# Altium PCB PCB1.PcbDoc
Units mm, origin at the board's own origin, x right, y up, seen from the top; angles counter-clockwise.
Board outline 52 x 52 mm, 4 copper layers (Top Layer, Layer 1, Layer 2, Bottom Layer), stack 1.448 mm thick; 9 components, 17 nets, 66 pads, 0 vias.
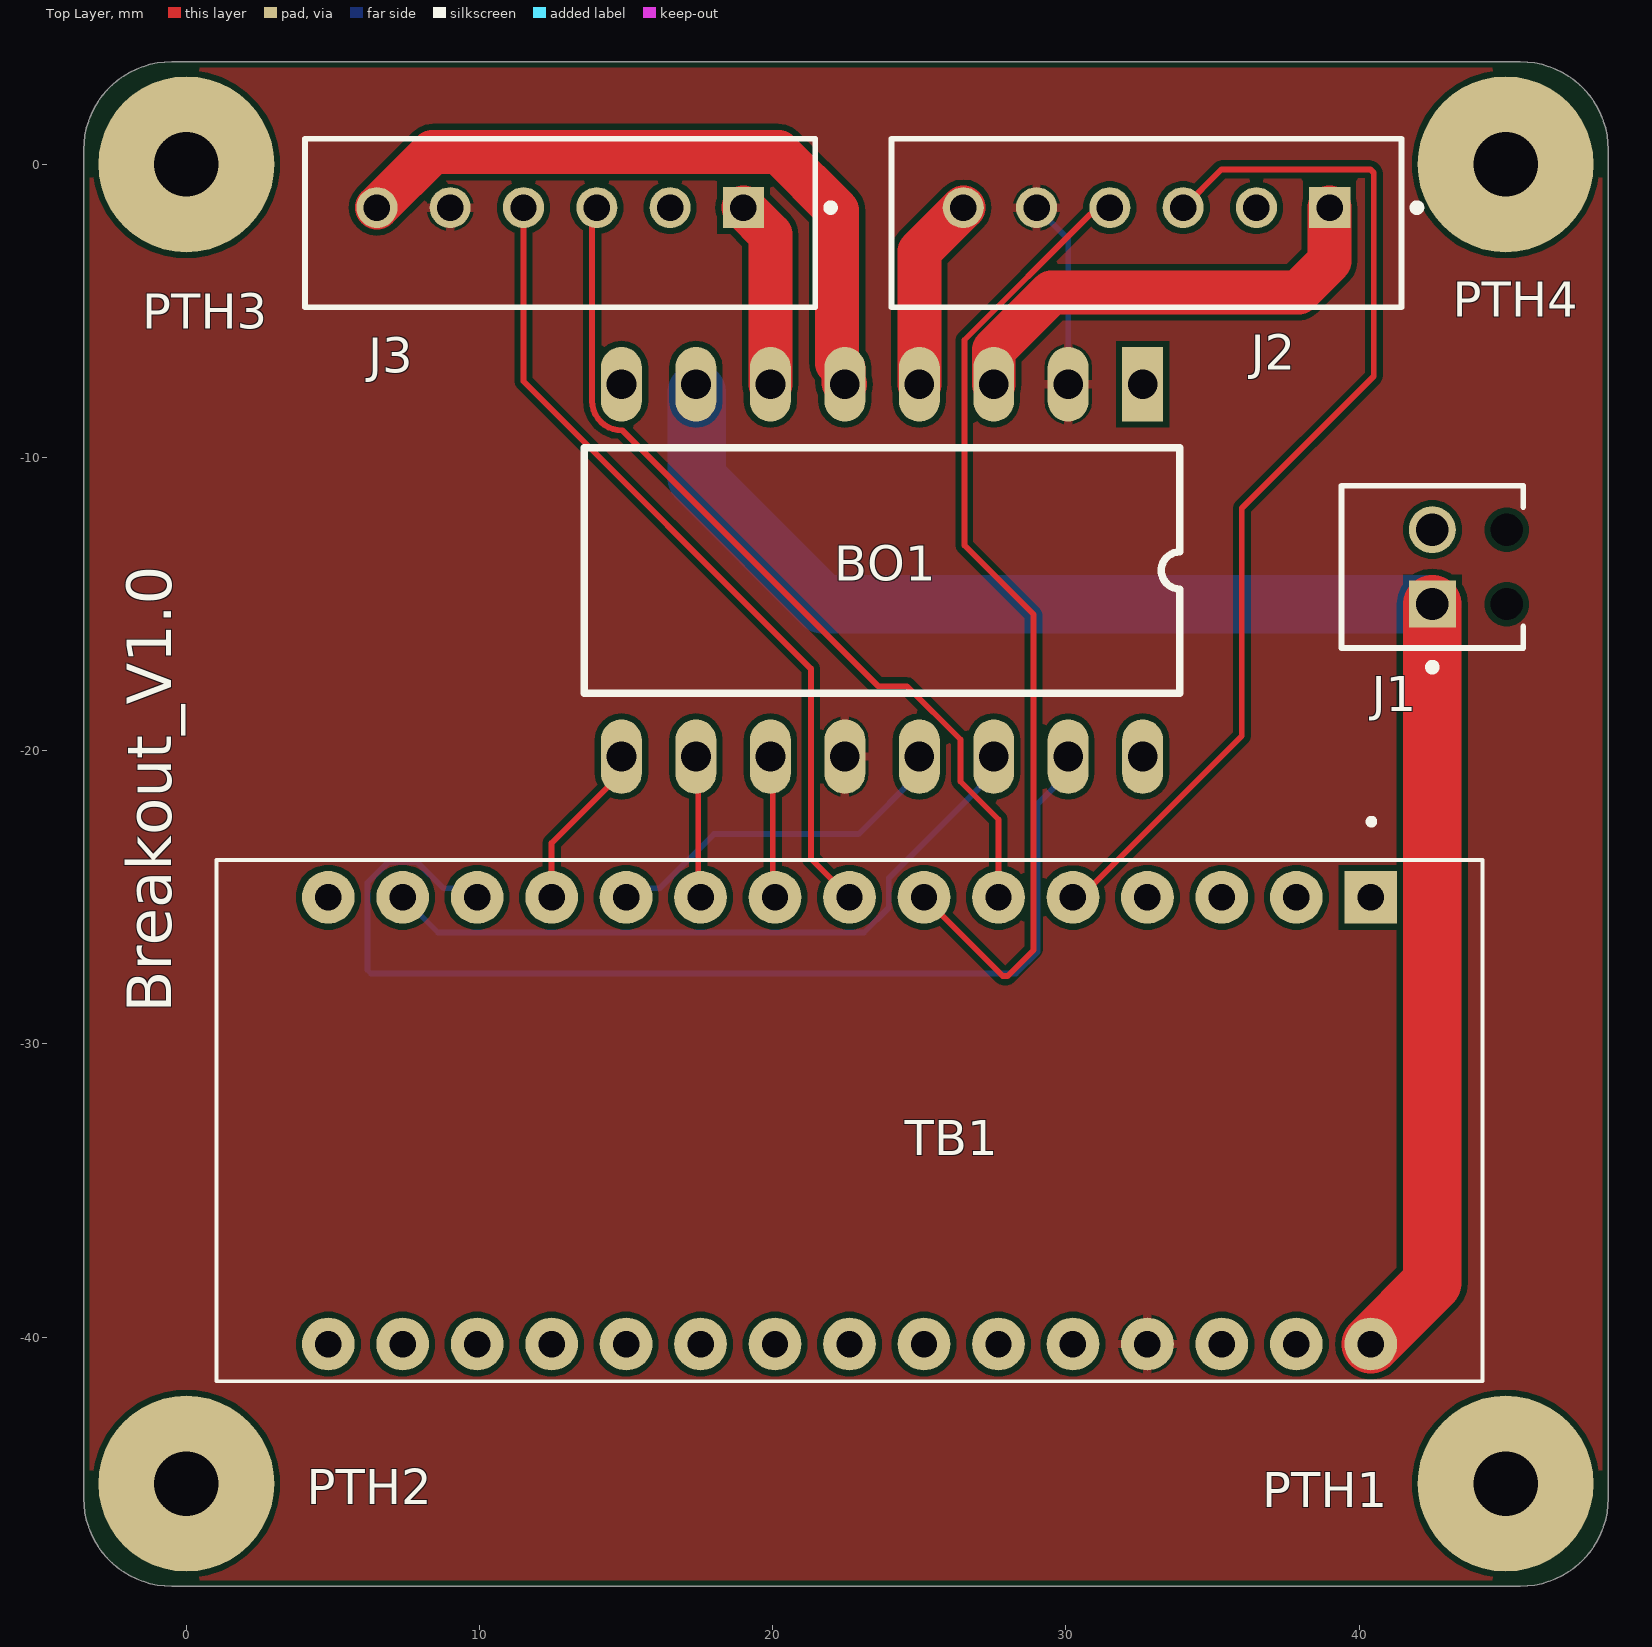
[diagram p0: Top Layer view]
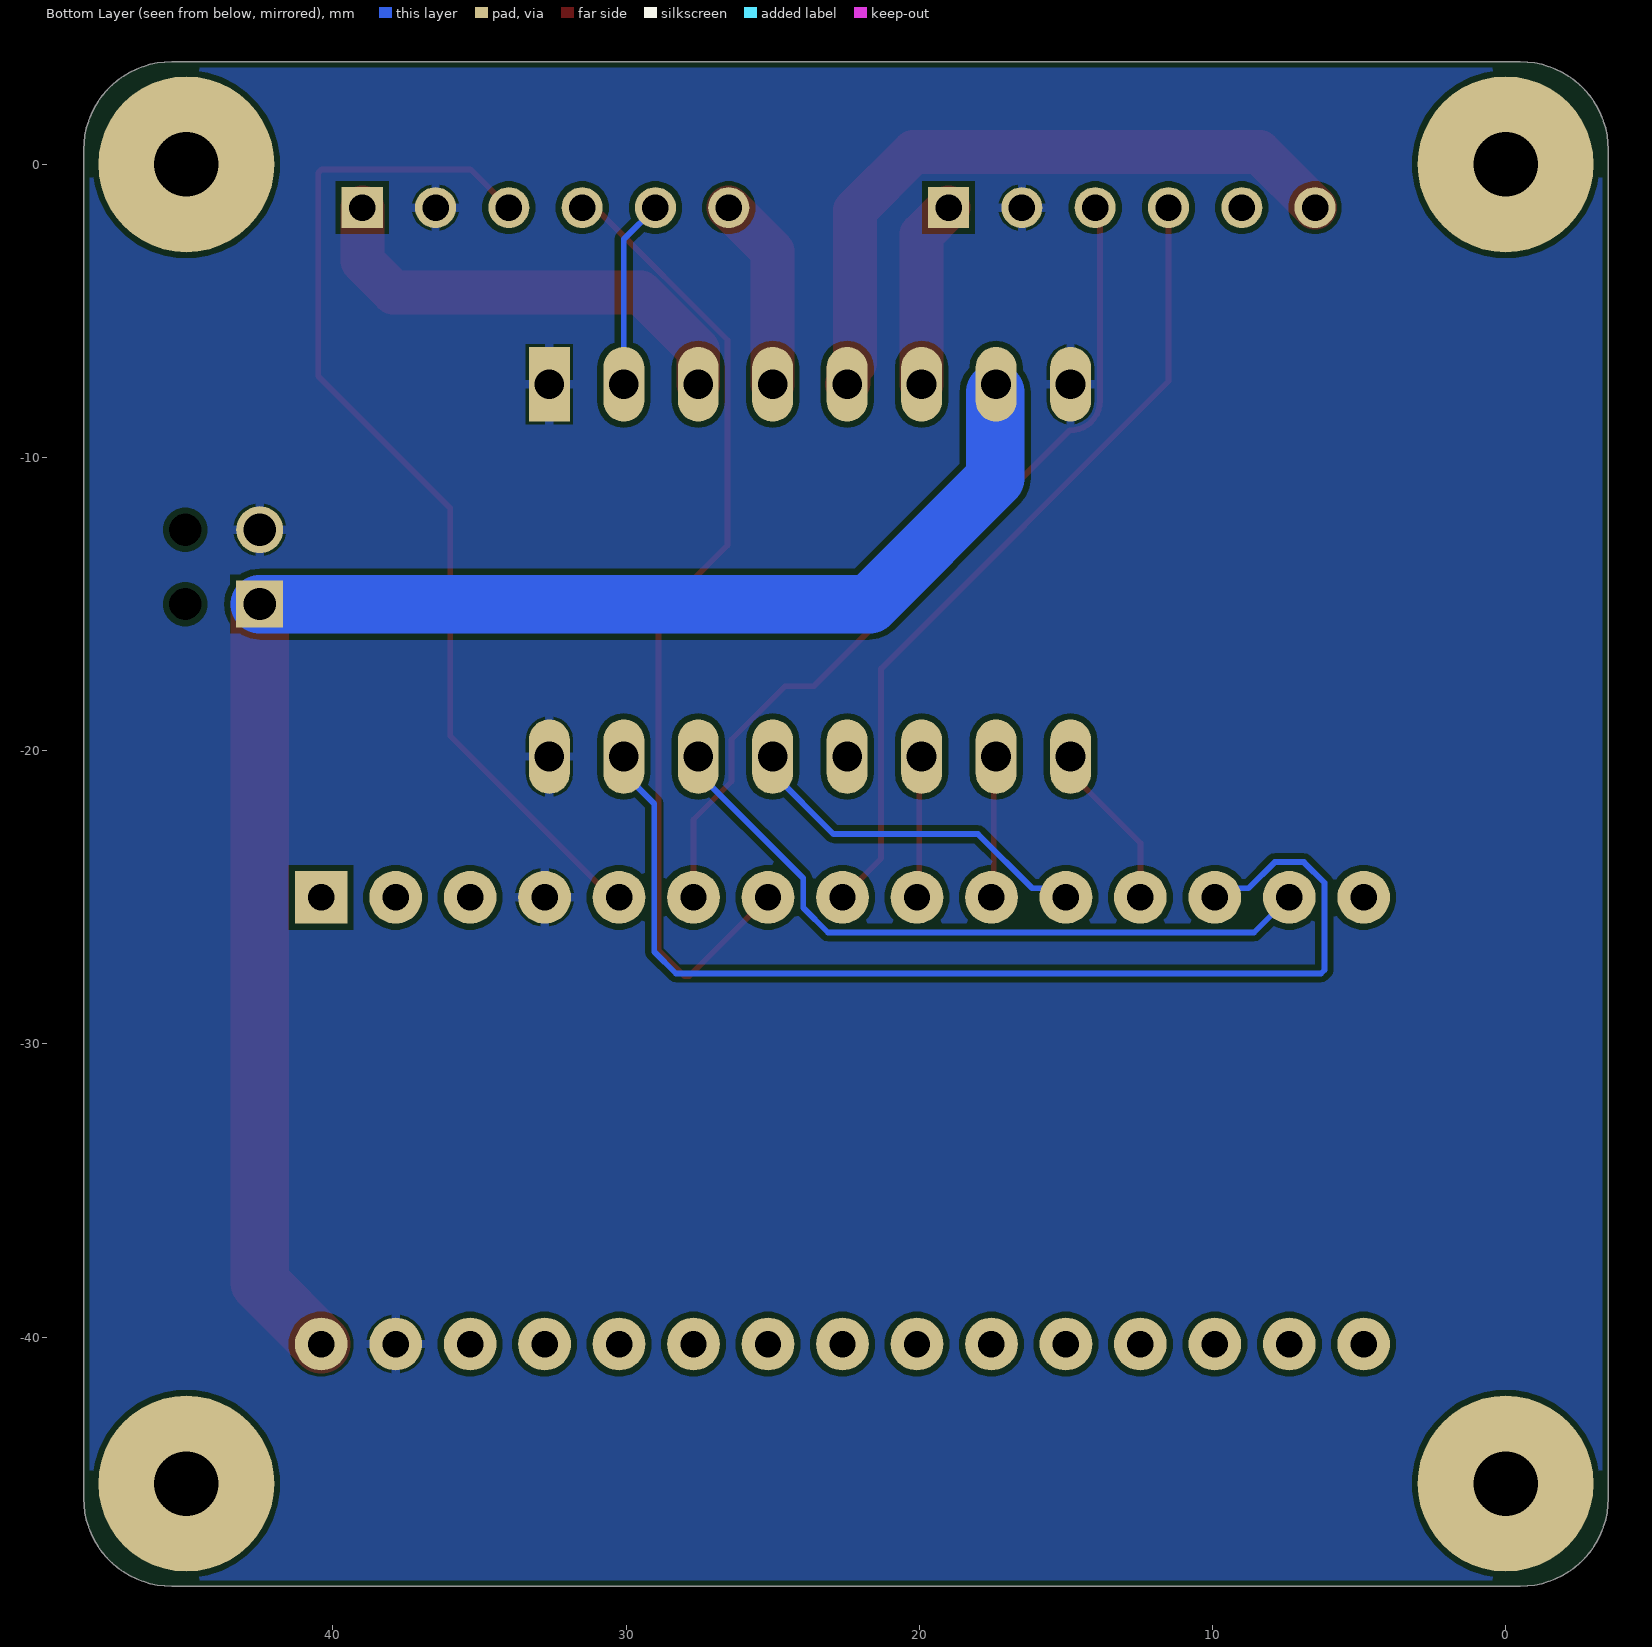
[diagram p1: Bottom Layer view, seen from below]
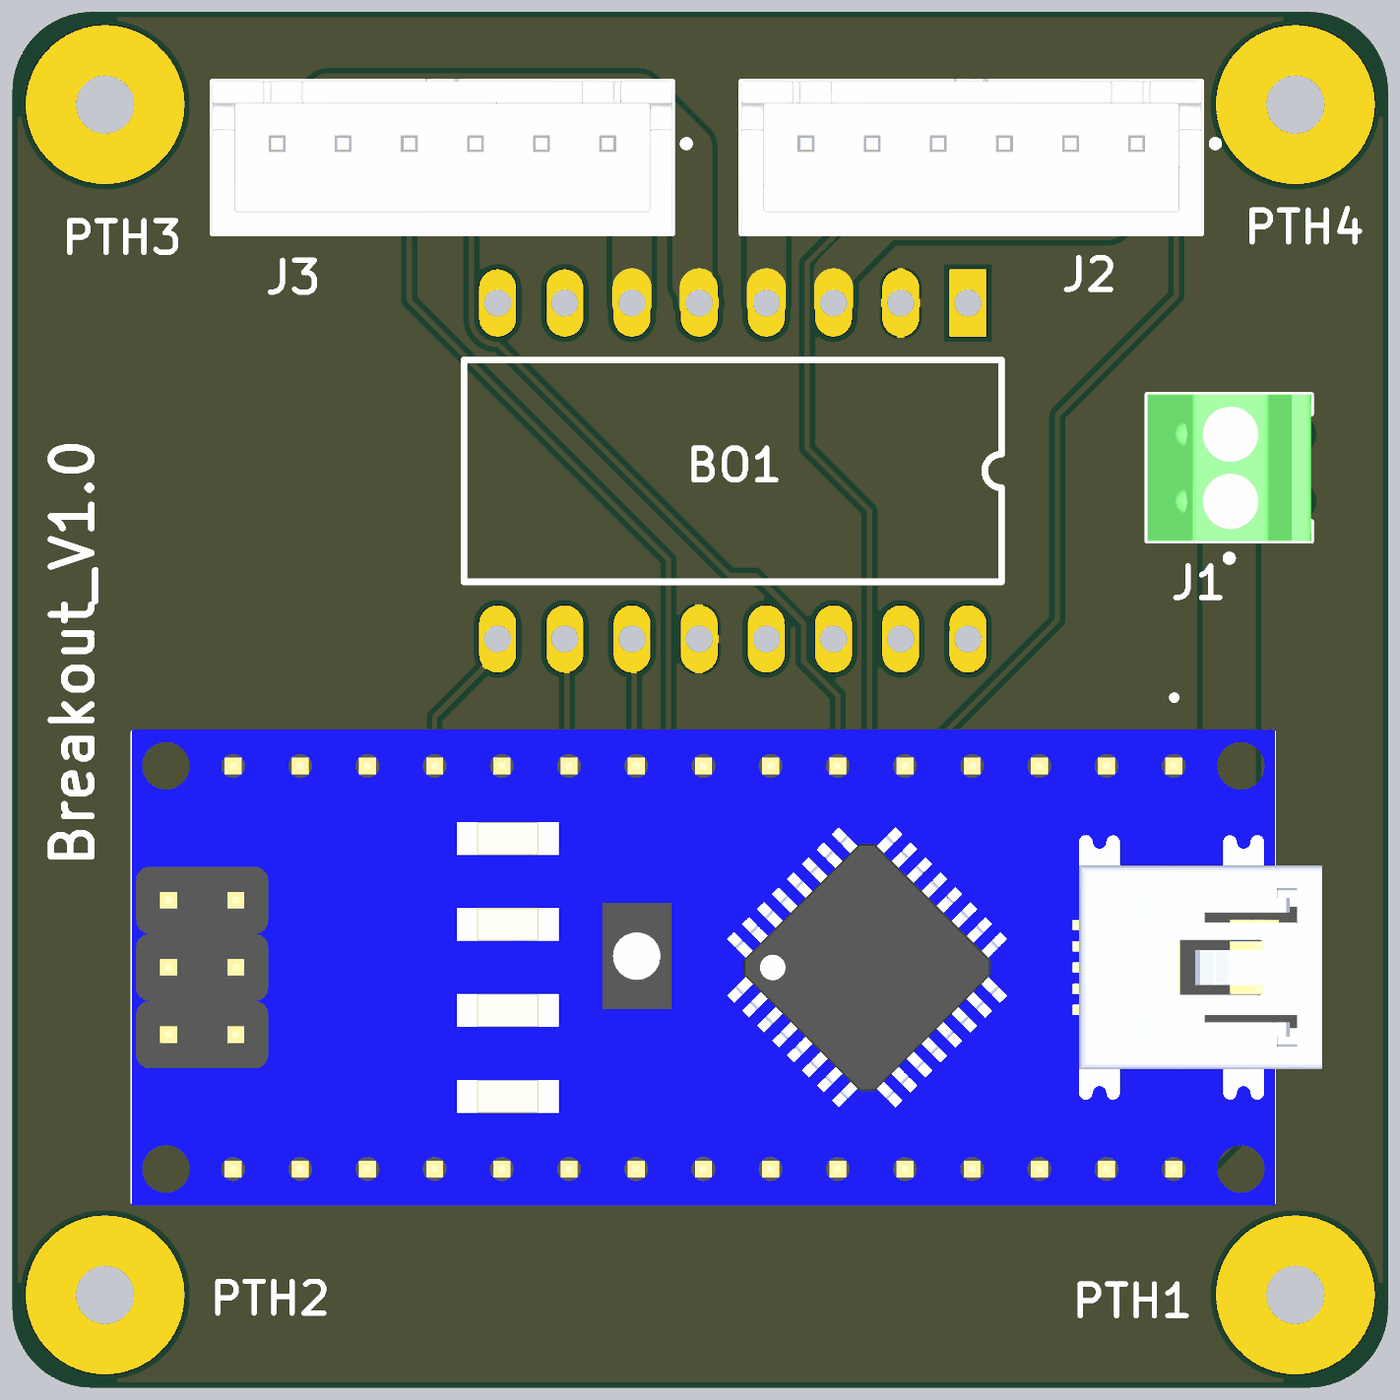
[diagram p2: 3D render of the assembled board from above, using the file's embedded part models]

## Layer stack, top to bottom
Top Solder: solder mask 0.0102, Solder Resist, Dk 3.5
Top Layer: signal copper 0.0356
Dielectric 2: prepreg 0.0711, PP-006, Dk 4.1
Layer 1: signal copper 0.0175
Dielectric 1: dielectric 1.2, FR-4, Dk 4.8
Layer 2: signal copper 0.0175
Dielectric 3: prepreg 0.0711, PP-006, Dk 4.1
Bottom Layer: signal copper 0.0356
Bottom Solder: solder mask 0.0102, Solder Resist, Dk 3.5

## Board outline
-3.5,-45.5 -3.5,0.5 cw(c-0.5,0.5) -0.5,3.5 45.5,3.5 cw(c45.5,0.5) 48.5,0.5 48.5,-45.5 cw(c45.5,-45.5) 45.5,-48.5 -0.5,-48.5 cw(c-0.5,-45.5)

## Design rules (kind name [scope] priority, off if disabled: settings)
BoardOutlineClearance [All] p1: gap=0.2 ignorepadtopadclearanceinfootprint=FALSE
Clearance [All] p1: gap=0.2 ignorepadtopadclearanceinfootprint=TRUE except(0: Arc-Text Arc-Hole Track-Text Track-Hole SMDPad-Text SMDPad-Hole THPad-Text THPad-Hole Via-Text Via-Hole Fill-Text Fill-Hole Poly-Text Poly-Hole Region-Text Region-Hole Text-Text Text-Hole; 0.1: Arc-Arc Arc-Track Track-Track)
HoleSize [All] p1: absolutevalues=TRUE maxlimit=6.3 minlimit=0.3 maxpercent=80.000 minpercent=20.000
MinimumAnnularRing [All] p1: minimumring=0.13
MinimumSolderMaskSliver [All] p1: minsoldermaskwidth=0.098
PolygonConnect "PTH-M3 Connect" [All vs HasFootprint('PTH-M3')] p1: connectstyle=Direct reliefconductorwidth=0.254 reliefentries=4 polygonreliefangle="90 Angle" airgapwidth=0.254
PolygonConnect [All] p2: thpad.connectstyle=Relief thpad.reliefconductorwidth=0.3 thpad.reliefentries=4 thpad.polygonreliefangle="90 Angle" thpad.airgapwidth=0.1 smdpad.connectstyle=Relief smdpad.reliefconductorwidth=0.3 smdpad.reliefentries=4 smdpad.polygonreliefangle="90 Angle" smdpad.airgapwidth=0.1 via.connectstyle=Direct via.reliefconductorwidth=0.254 via.reliefentries=4 via.polygonreliefangle="90 Angle" via.airgapwidth=0.254
RoomDefinition Schemeatic_1_0 [InComponentClass('Schemeatic_1_0')] p1: confinementstyle=ConfineIn formatcopy=TRUE lockcomponents=FALSE outline -7.5,-50.4 50.4,-50.4 50.4,5.4 -7.5,5.4
RoutingVias [All] p1: holewidth=0.3 width=0.6 viastyle="Through Hole" minholewidth=0.3 minwidth=0.45 maxholewidth=6.35 maxwidth=3
SilkToSilkClearance [All] p1: silktosilkclearance=0.1
SilkToSolderMaskClearance [IsPad] p1: minsilkscreentomaskgap=0 clearancetoexposedcopper=TRUE
SolderMaskExpansion "Tent Vias" [IsVia] p1: expansion=0.102 istentingtop=TRUE
SolderMaskExpansion [All] p2: expansion=0.038 istentingtop=FALSE
Width PowerNets [InNetClass('PowerNets')] p1: maxlimit=0.5 minlimit=0.2 preferedwidth=0.2 minimp=50.000000 maximp=50.000000 favimp=50.000000
Width [All] p2: maxlimit=2 minlimit=0.1 preferedwidth=0.2 minimp=50.000000 maximp=50.000000 favimp=50.000000
26 further rules are at their usual default settings.

## Components (designator, comment, footprint, x,y, rotation, side; value= is the part's Value field where it differs from the comment)
BO1 "TB6612FNG Dual Motor Driver Carrier" "DIP16 - duplicate1" 32.62,-7.5 r270 top
J1 "1725656" PHOE-1725656-2 42.5,-13.73 r90 top
J2 "B6B-XH-A(LF)(SN)" FP-B6B-XH-A_LF_SN-MFG 32.75,-2 r180 top
J3 "B6B-XH-A(LF)(SN)" FP-B6B-XH-A_LF_SN-MFG 12.75,-2 r180 top
PTH1 "PTH-M2" PTH-M2#1 47.5,-45 r0 top
PTH2 "PTH-M2" PTH-M2#2 0,-45 r0 top
PTH3 "PTH-M2" PTH-M2#2 0,0 r0 top
PTH4 "PTH-M2" PTH-M2#2 45,0 r0 top
TB1 "ARDUINO_NANO" SHIELD_ARDUINO_NANO 22.62,-32.62 r270 top

## Footprints (in the part's own frame and the unit in brackets; to place one, negate y for a bottom-side part, rotate by r counter-clockwise, add the part's x,y. Pads: shape width x height; smd on the part's side, far side on the other; paste and mask are expansions set on the pad)
"DIP16 - duplicate1" [mil]
  rect 100x55 hole 40: 1(0,0)
  oval 100x55 hole 40: 2(0,-100) 3(0,-200) 4(0,-300) 5(0,-400) 6(0,-500) 7(0,-600) 8(0,-700) 9(500,-700) 10(500,-600) 11(500,-500) 12(500,-400) 13(500,-300) 14(500,-200) 15(500,-100) 16(500,0)
  silkscreen extent 85,-750 415,50
FP-B6B-XH-A_LF_SN-MFG [mm]
  rect 1.4x1.4 hole 0.9 paste-1000 mask+0: 1(-6.25,-0.525)
  round 1.4 hole 0.9 paste-1000 mask+0: 2(-3.75,-0.525) 3(-1.25,-0.525) 4(1.25,-0.525) 5(3.75,-0.525) 6(6.25,-0.525)
  silkscreen extent -9.35,-2.88 8.7,2.88, body extent -8.8,-2.98 8.8,2.98, height 0.25
PHOE-1725656-2 [mm] "Connector, 2-Leads, Body 6.2x5.4mm, Pitch 2.54mm"
  rect 1.6x1.6 hole 1.1: 1(-1.27,0)
  round 1.6 hole 1.1: 2(1.27,0)
  round 0 hole 1.1 unplated: MH1(-1.27,-2.54) MH2(1.27,-2.54)
  silkscreen extent -3.54,-3.1 2.77,3.1, body extent -2.77,-3.1 2.77,3.1, height 9
PTH-M2#1 [mm] "M2 Clearance (2.2 mm) Plated Through Hole, 6mm Diameter Pad"
  round 6 hole 2.2: 1(-2.5,0)
PTH-M2#2 [mm] "M2 Clearance (2.2 mm) Plated Through Hole, 6mm Diameter Pad"
  round 6 hole 2.2: 1(0,0)
SHIELD_ARDUINO_NANO [mm]
  rect 1.8x1.8 / inner round 1.8 / far side rect 1.8x1.8 hole 0.9: 1(-7.62,17.78)
  round 1.8 hole 0.9: 2(-7.62,15.24) 3(-7.62,12.7) 4(-7.62,10.16) 5(-7.62,7.62) 6(-7.62,5.08) 7(-7.62,2.54) 8(-7.62,0) 9(-7.62,-2.54) 10(-7.62,-5.08) 11(-7.62,-7.62) 12(-7.62,-10.16) 13(-7.62,-12.7) 14(-7.62,-15.24) 15(-7.62,-17.78) 16(7.62,-17.78) 17(7.62,-15.24) 18(7.62,-12.7) 19(7.62,-10.16) 20(7.62,-7.62) 21(7.62,-5.08) 22(7.62,-2.54) 23(7.62,0) 24(7.62,2.54) 25(7.62,5.08) 26(7.62,7.62) 27(7.62,10.16) 28(7.62,12.7) 29(7.62,15.24) 30(7.62,17.78)
  silkscreen extent -10.3,-21.59 8.89,21.59, body extent -9,-21.6 9,23.4, height 12.6

## Part data
BO1: library part TB6612FNG_Breakout
J1: library part CMP-2000-05299-1, "Male Header, Pitch 2.54 mm, 1 x 2 Position, Height 9 mm, Tail Length 3.5 mm", Colour=Green, Manufacturer="Phoenix Contact", Content=250pc(s), Datasheet URL=http://datasheet.octopart.com/1725656-Phoenix-Contact-datasheet-5302866.pdf, Datasheet Version=Apr-08, Industrial packaging=Yes, Manufacturer part No.=1725656, Manufacturer URL=http://www.phoenixcontact.com/, Number of contacts=2, Pitch=2.54mm, Type=MPT0,5/2-2,54
J2 J3: library part CMP-17439-000076-1, "CONN HEADER VERT 6POS 2.5MM"
PTH1 PTH2 PTH3 PTH4: library part CMP-00028-00016-2, "M2 Clearance (2.2 mm) Plated Through Hole, 6mm Diameter Pad", Created By="Robert Howie", Design Item ID=CMP-00003-1, Pins=1, Source="Components - 02.08.23 - 11.22.SchLib"
TB1: "Small, complete, and breadboard-friendly board based on the ATmega328 (Arduino Nano 3.x)", Package="Non-Standard Arduino", Availability="Not in stock", Check_prices=https://www.snapeda.com/parts/Arduino%20Nano/Arduino/view-part/?ref=eda, MF=Arduino, MP="Arduino Nano", Price=None, SnapEDA_Link=https://www.snapeda.com/parts/Arduino%20Nano/Arduino/view-part/?ref=snap

## Nets (pads, with @x,y where several pads share a name; then routed paths per layer and width w, separated by ;. In a path a pad name is that pad's centre, name@x,y a point inside that pad or via, vN(x,y) a via of type N, cw(c..) or ccw(c..) an arc to the next point about the centre after c; other vN are vias at no path point)
+5V: BO1.2 BO1.12 J2.5 J3.5 TB1.27 | length 6.5
  Bottom Layer w0.2: J2.5 30.08,-2.555 BO1.2
+12: BO1.7 J1.1 TB1.30 | length 55.9
  Top Layer w2: TB1.30 42.5,-38.14 J1.1
  Bottom Layer w2: BO1.7@17.412,-7.77 17.412,-10.712 21.7,-15 J1.1
A01: BO1.3 J2.1 | length 15.7
  Top Layer w1.5: BO1.3 27.54,-6.335 29.503,-4.372 37.928,-4.372 39,-3.3 J2.1
A02: BO1.4 J2.6 | length 6.6
  Top Layer w1.5: BO1.4 25,-2.975 J2.6
AIN1: BO1.11 TB1.9 | length 4.9
  Top Layer w0.2: BO1.11 20,-20.28 20,-24.92 TB1.9
AIN2: BO1.10 TB1.10 | length 4.9
  Top Layer w0.2: BO1.10 17.46,-20.28 17.46,-24.92 TB1.10
B01: BO1.6 J3.1 | length 6.4
  Top Layer w1.5: J3.1 19.92,-2.395 BO1.6
B02: BO1.5 J3.6 | length 23.3
  Top Layer w1.5: J3.6 8.4,0.425 20.197,0.425 22.2,-1.578 22.2,-6.772 22.408,-6.98 22.408,-7.448 BO1.5
BIN1: BO1.13 TB1.11 | length 13
  Bottom Layer w0.2: TB1.11 15.306,-24.694 16.149,-24.694 17.996,-22.847 22.924,-22.847 25,-20.772 BO1.13 BO1.13@24.529,-20.672
BIN2: BO1.14 TB1.14 | length 24.1
  Top Layer w0.2: TB1.14 TB1.14@7.39,-24.99
  Bottom Layer w0.2: TB1.14 8.58,-26.2 23.117,-26.2 23.96,-25.357 23.96,-24.352 27.54,-20.772 BO1.14
GND: BO1.1 BO1.8 BO1.16 J1.2 J2.2 J3.2 TB1.4 TB1.29 | length 0.2
  Top Layer w0.381: BO1.16 BO1.16@32.7,-20.28 ; TB1.4@32.7,-24.92 TB1.4
MA1: J2.4 TB1.7 | length 33.8
  Top Layer w0.2: TB1.7 27.847,-27.687 28.013,-27.687 28.9,-26.8 28.9,-15.353 26.542,-12.995 26.542,-5.99 30.827,-1.705 31.27,-1.705 J2.4
MA2: J3.4 TB1.8 | length 28.1
  Top Layer w0.2: J3.4 11.5,-7.4 21.3,-17.2 21.3,-23.68 TB1.8
MB1: J2.3 TB1.5 | length 36.2
  Top Layer w0.2: TB1.5 30.5,-25 36,-19.5 36,-11.729 40.5,-7.229 40.5,-0.286 40.383,-0.169 35.306,-0.169 J2.3
MB2: J3.3 TB1.6 | length 30.1
  Top Layer w0.2: J3.3 13.842,-1.633 13.842,-8.072 ccw(c14.84,-8.072) 14.87,-9.07 23.6,-17.8 24.584,-17.8 26.404,-19.62 26.404,-21.047 27.7,-22.344 TB1.6
PWMA: BO1.9 TB1.12 | length 5.8
  Top Layer w0.2: TB1.12 12.46,-23.152 14.84,-20.772 BO1.9
PWMB: BO1.15 TB1.13 | length 37.8
  Bottom Layer w0.2: TB1.13 9.614,-24.694 8.771,-24.694 7.877,-23.8 6.883,-23.8 6.18,-24.503 6.18,-27.483 6.297,-27.6 28.3,-27.6 29.04,-26.86 29.04,-21.812 30.08,-20.772 BO1.15
pads on no net: J1.MH1 J1.MH2 PTH1.1 PTH2.1 PTH3.1 PTH4.1 TB1.1 TB1.2 TB1.3 TB1.15 TB1.16 TB1.17 TB1.18 TB1.19 TB1.20 TB1.21 TB1.22 TB1.23 TB1.24 TB1.25 TB1.26 TB1.28

## Polygon pours and split planes (outlines as drawn)
GND on Bottom Layer "GND_L04_P001" (solid, pour order 1): -3.5,4.149 -3.5,-48.5 47.3,-48.5 48.5,-47.3 48.5,4.251
+5V on Top Layer "+5V_L01_P000" (solid, pour order 0): -3.5,4.149 -3.5,-48.5 47.5,-48.5 49.3,-46.7 49.3,4.252

## Silkscreen, mask and mechanical layers (free items; w line width, h text height)
Top Overlay:
  text "Breakout_V1.0" at -0.508,-28.946 h1.52 r90
Mechanical 1:
  the board outline again, w0.254